# Altium PCB adxl357.PcbDoc
Units mil, origin at the board's own origin, x right, y up, seen from the top; angles counter-clockwise.
Board outline 730 x 480 mil, 2 copper layers (Top Layer, Bottom Layer), stack 12.8 mil thick; 27 components, 16 nets, 71 pads, 43 vias.
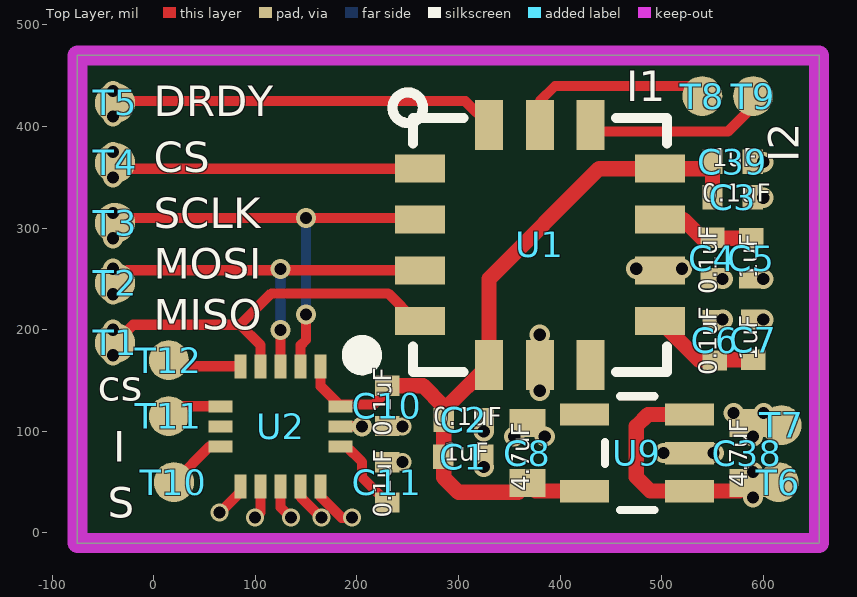
[diagram p0: Top Layer view]
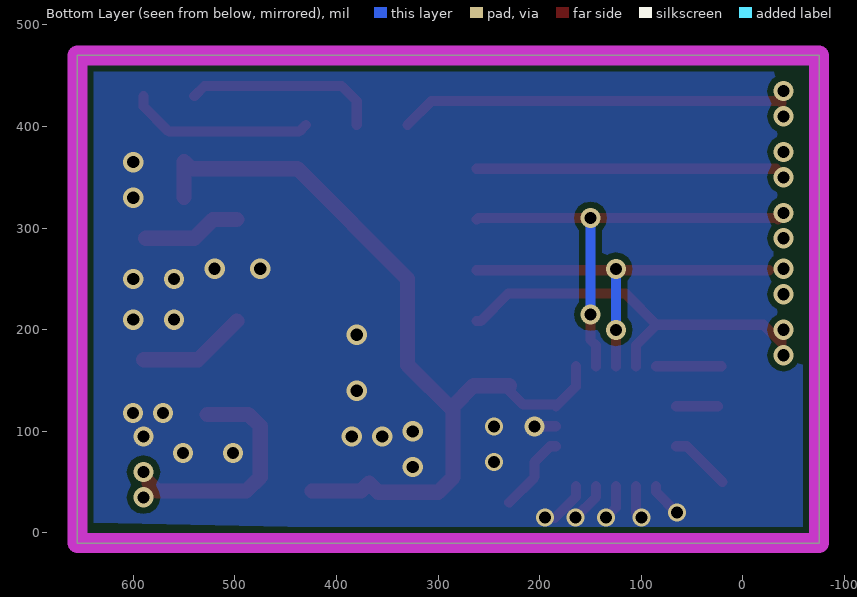
[diagram p1: Bottom Layer view, seen from below]

## Layer stack, top to bottom
Top Solder: solder mask 0.4, Solder Resist, Dk 3.8
Top Layer: signal copper 1.4
Dielectric 1: core 10, Dk 4.2
Bottom Layer: signal copper 1.4
Bottom Solder: solder mask 0.4, Solder Resist, Dk 3.8

## Board outline
-75,-10 655,-10 655,470 -75,470

## Design rules (kind name [scope] priority, off if disabled: settings)
Clearance [All] p1: gap=6 ignorepadtopadclearanceinfootprint=FALSE except(0: Arc-Hole Track-Hole SMDPad-Hole THPad-Hole Via-Hole Fill-Hole Poly-Hole Region-Hole Text-Hole)
DiffPairsRouting [All] p1: maxlimit=10 minlimit=10 mostfreqgap=10 toplayer_minwidth=5.98 toplayer_maxwidth=15 toplayer_prefwidth=15 bottomlayer_minwidth=5.98 bottomlayer_maxwidth=15 bottomlayer_prefwidth=15 maxuncoupledlength=500
MinimumSolderMaskSliver [All] p1 off: minsoldermaskwidth=10
PlaneClearance [All] p1: clearance=10
PlaneConnect [All] p1: planeconnectstyle=Direct reliefexpansion=20 reliefentries=4 reliefconductorwidth=10 reliefairgap=10
PolygonConnect [All] p1: connectstyle=Direct reliefconductorwidth=10 reliefentries=4 polygonreliefangle="90 Angle" airgapwidth=10
RoomDefinition adxl357 [InComponentClass('adxl357')] p1 off: confinementstyle=ConfineIn formatcopy=TRUE lockcomponents=FALSE outline 1697.28,-45.2 4042.28,-45.2 4042.28,194.8 1697.28,194.8
RoutingVias [All] p1: holewidth=12 width=20 viastyle="Through Hole" minholewidth=11.81 minwidth=19.68 maxholewidth=28 maxwidth=50
SilkToBoardRegionClearance [All] p1 off:
SilkToSilkClearance [All] p1 off: silktosilkclearance=10
SilkToSolderMaskClearance [IsPad] p1 off: minsilkscreentomaskgap=10 clearancetoexposedcopper=TRUE
SolderMaskExpansion [All] p1: expansion=4
Width [All] p1: maxlimit=60 minlimit=6 preferedwidth=6
23 further rules are at their usual default settings.

## Components (designator, comment, footprint, x,y, rotation, side; value= is the part's Value field where it differs from the comment)
C1 "1uF" 0402 305,75 r180 top
C2 "0.1uF" 0402 305.43,111.22 r180 top
C3 "1uF" 0402 570,330.47 r180 top
C4 "0.1uF" 0402 550,270.47 r90 top
C5 "1uF" 0402 588.12,270.15 r90 top
C6 "0.1uF" 0402 552.44,189.8 r270 top
C7 "1uF" 0402 590,190.47 r270 top
C8 "4.7uF" 0603L 367.87,78.58 r270 top
C10 "0.1uF" 0402 230,125 r90 top
C11 "0.1uF" 0402 230,50 r270 top
C38 "4.7uF" 0603L 584.41,78.58 r270 top
C39 "0.1uF" 0402 570,365.47 r180 top
T1 "TestPad" "TestPad - 1mm" -37.99,187.01 r0 top
T2 "TestPad" "TestPad - 1mm" -37.99,246.06 r0 top
T3 "TestPad" "TestPad - 1mm" -37.99,305.12 r0 top
T4 "TestPad" "TestPad - 1mm" -37.99,364.17 r0 top
T5 "TestPad" "TestPad - 1mm" -37.99,423.23 r0 top
T6 "TestPad" "TestPad - 1mm" 615,50 r180 top
T7 "TestPad" "TestPad - 1mm" 617.99,106.1 r180 top
T8 "TestPad" "TestPad - 1mm" 540,430 r0 top
T9 "TestPad" "TestPad - 1mm" 590,430 r0 top
T10 "TestPad" "TestPad - 1mm" 20,50 r90 top
T11 "TestPad" "TestPad - 1mm" 15,115 r90 top
T12 "TestPad" "TestPad - 1mm" 15,170 r90 top
U1 "ADXL357" ADXL357 380.12,283.54 r0 top
U2 "ICM20602" ICM20602 125,105 r270 top
U9 "LP5907" SOT23-5 476.14,78.58 r90 top

## Footprints (in the part's own frame and the unit in brackets; to place one, negate y for a bottom-side part, rotate by r counter-clockwise, add the part's x,y. Pads: shape width x height; smd on the part's side, far side on the other; paste and mask are expansions set on the pad)
0402 [mil] "0402-RES"
  rect 20x24 smd: 1(-19.68,0) 2(20,0)
0603L [mm]
  rect 0.7x0.9 smd: 1(-0.75,0) 2(0.75,0)
  body extent -0.8,-0.4 0.8,0.4, height 0.8
ADXL357 [mm]
  rect 1.25x0.7 smd: 1(-3,1.905) 2(-3,0.635) 3(-3,-0.635) 4(-3,-1.905) 8(3,-1.905) 9(3,-0.635) 10(3,0.635) 11(3,1.905)
  rect 0.7x1.25 smd: 5(-1.27,-3) 6(0,-3) 7(1.27,-3) 12(1.27,3) 13(0,3) 14(-1.27,3)
  silkscreen extent -3.68,-3.17 3.17,3.81, body extent -3,-3 3,3, height 2
ICM20602 [mm]
  rect 0.6x0.3 smd: 1(-1.5,1) 2(-1.5,0.5) 3(-1.5,0) 4(-1.5,-0.5) 5(-1.5,-1) 9(1.5,-1) 10(1.5,-0.5) 11(1.5,0) 12(1.5,0.5) 13(1.5,1)
  rect 0.3x0.6 smd: 6(-0.5,-1.5) 7(0,-1.5) 8(0.5,-1.5) 14(0.5,1.5) 15(0,1.5) 16(-0.5,1.5)
  silkscreen extent -2.03,1.78 -1.52,2.29, body extent -1.5,-1.5 1.5,1.5, height 0.75
SOT23-5 [mil] "SOT23-5"
  rect 22x48 smd: 1(-37.4,-51.19) 2(0,-51.19) 3(38,-51.19) 4(38,52) 5(-37.4,52)
  silkscreen extent -56,-17 56,32, body extent -57,-55 57,55, height 47
"TestPad - 1mm" [mm]
  round 1 smd: 1(0,0)

## Part data
C1 C2 C3 C4 C5 C6 C7 C8 C10 C11 C38 C39: library part Cap, "Capacitor", LatestRevisionDate=17-Jul-2002, LatestRevisionNote="Re-released for DXP Platform.", PackageDescription="Radial Cap, Thru-Hole; 2 Leads; 0.3 in Pin Spacing", PackageReference=RAD-0.3, Published=8-Jun-2000, Publisher="Altium Limited"

## Via types
v1: diameter 20, hole 12, Top Layer to Bottom Layer, 31 vias
v2: diameter 17.72, hole 11.81, Top Layer to Bottom Layer, 7 vias
v3: diameter 19.68, hole 11.81, Top Layer to Bottom Layer, 5 vias

## Nets (pads, with @x,y where several pads share a name; then routed paths per layer and width w, separated by ;. In a path a pad name is that pad's centre, name@x,y a point inside that pad or via, vN(x,y) a via of type N, cw(c..) or ccw(c..) an arc to the next point about the centre after c; other vN are vias at no path point)
3.3: C1.2 C2.2 C3.2 C8.2 C10.2 C39.2 U1.5 U1.11 U2.1 U2.16 U9.5 | length 842
  Top Layer w10: U2.1 164.37,144.37 U2.16 184.06,126.32 216.32,126.32 230,140 C10.2
  Top Layer w15: C10.2 265,145 285.43,124.57 C2.2@285.43,120.75 ; U9.5 375.75,41.18 C8.2 358.82,40 300,40 285.43,54.57 C2.2 C2.2@285.43,120.75 ; C3.2 C39.2 543.07,358.54 U1.11 438.54,358.54 330.12,250.12 U1.5 C2.2@285.43,120.75
3.8: C38.2 T6.1 U9.1 U9.3 | length 225.5
  Top Layer w15: U9.3 486.58,116.58 475,105 475,55 488.82,41.18 U9.1 576.53,41.18 C38.2
  other v1: 590,35 590,60
GND: C1.1 C2.1 C3.1 C4.1 C5.1 C6.1 C7.1 C8.1 C10.1 C11.1 C38.1 C39.1 T7.1 U1.6 U1.9 U2.9 U2.10 U2.11 U2.12 U2.13 U2.15 U9.2 | length 212.5
  Top Layer w10: v2(65,20) 85.63,40.63 U2.9 ; v2(100,15) 105.32,20.32 U2.10 ; U2.11 125,25 v2(135,15) ; U2.12 144.68,35.32 v2(165,15) ; U2.13 164.37,35.63 185,15 v2(195,15) ; U2.15 v3(205,105)
  other v1: 325,65 501.97,78.74 551.18,78.74 355,95 385,95 590,95 325,100 570.87,118.11 600.39,118.11 380,140 380,195 560,210 600,210 560,250 600,250 475,260 520,260 600,330 600,365
  other v2: 245,70 245,105
MISO: T1.1 U1.4 U2.4 | length 390.9
  Top Layer w10: T1.1@-37.99,197.01 T1.1 -20,205 85,205 ; U2.4 105.32,184.68 85,205 ; U1.4 258.07,208.54 230.77,235.84 115.84,235.84 85,205
  other v1: -40,175 -40,200
MOSI: T2.1 U1.3 U2.3 | length 383.5
  Top Layer w10: T2.1@-25.51,258.54 U1.3 ; U2.3 v3(125,200)
  Bottom Layer w10: v3(125,200) v3(125,260)
  other v1: -40,235 -40,260
NetC4_2: C4.2 C5.2 U1.10 | length 97.5
  Top Layer w15: U1.10 521.46,308.54 539.85,290.15 C5.2
NetC6_2: C6.2 C7.2 U1.8 | length 107.5
  Top Layer w15: U1.8 536.3,170.47 C7.2
NetC11_2: C11.2 U2.14 | length 77.6
  Top Layer w10: U2.14 189.68,85.32 205,70 205,55 C11.2
NetT4_1: T4.1 U1.1 | length 294.4
  Top Layer w10: T4.1@-32.36,358.54 U1.1
  other v1: -40,350 -40,375
NetT5_1: T5.1 U1.14 | length 378.5
  Top Layer w10: T5.1 -36.22,425 306.77,425 U1.14
  other v1: -40,410 -40,435
NetT8_1: T8.1 U1.13 | length 193.7
  Top Layer w10: U1.13 380.12,425.12 395,440 530,440 T8.1
NetT9_1: T9.1 U1.12 | length 183
  Top Layer w10: U1.12 436.77,395 565,395 590,420 T9.1
NetT10_1: T10.1 U2.8 | length 60.6
  Top Layer w10: T10.1 55.32,85.32 U2.8
NetT11_1: T11.1 U2.6 | length 41.3
  Top Layer w10: T11.1@24.68,124.68 U2.6
NetT12_1: T12.1 U2.5 | length 64.7
  Top Layer w10: T12.1@20.94,164.06 U2.5
SCK: T3.1 U1.2 U2.2 | length 445.9
  Top Layer w10: T3.1@-34.57,308.54 -33.11,310 v3(150,310) 260.55,310 U1.2 ; U2.2 144.68,184.68 150,190 v3(150,215)
  Bottom Layer w10: v3(150,215) v3(150,310)
  other v1: -40,290 -40,315
pads on no net: U1.7 U2.7 U9.4

## Polygon pours and split planes (outlines as drawn)
GND on Bottom Layer "GND_L02_P000" (solid, remove dead copper, pour order 0): -75,-4.47 -75,470 655,470 655,10.35

## Keep-outs
Keep-Out Layer:
  the board outline again, w19.68

## Silkscreen, mask and mechanical layers (free items; w line width, h text height)
Top Overlay:
  text "I1" at 465,425 h30
  text "DRDY" at 0,410 h30
  text "I2" at 635,365 h30 r90
  text "CS" at 0,355 h30
  text "SCLK" at 0,300 h30
  text "MOSI" at 0,250 h30
  text "MISO" at 0,200 h30
  text "cs" at -55,130 h30
  text "I" at -40,70 h30
  text "S" at -45,15 h30